# Altium PCB EJ8_LOGIC_PCB.PcbDoc
Units mm, origin at the board's own origin, x right, y up, seen from the top; angles counter-clockwise.
Board outline 100.08 x 50 mm, 2 copper layers (Top Layer, Bottom Layer); 14 components, 43 nets, 99 pads, 38 vias.
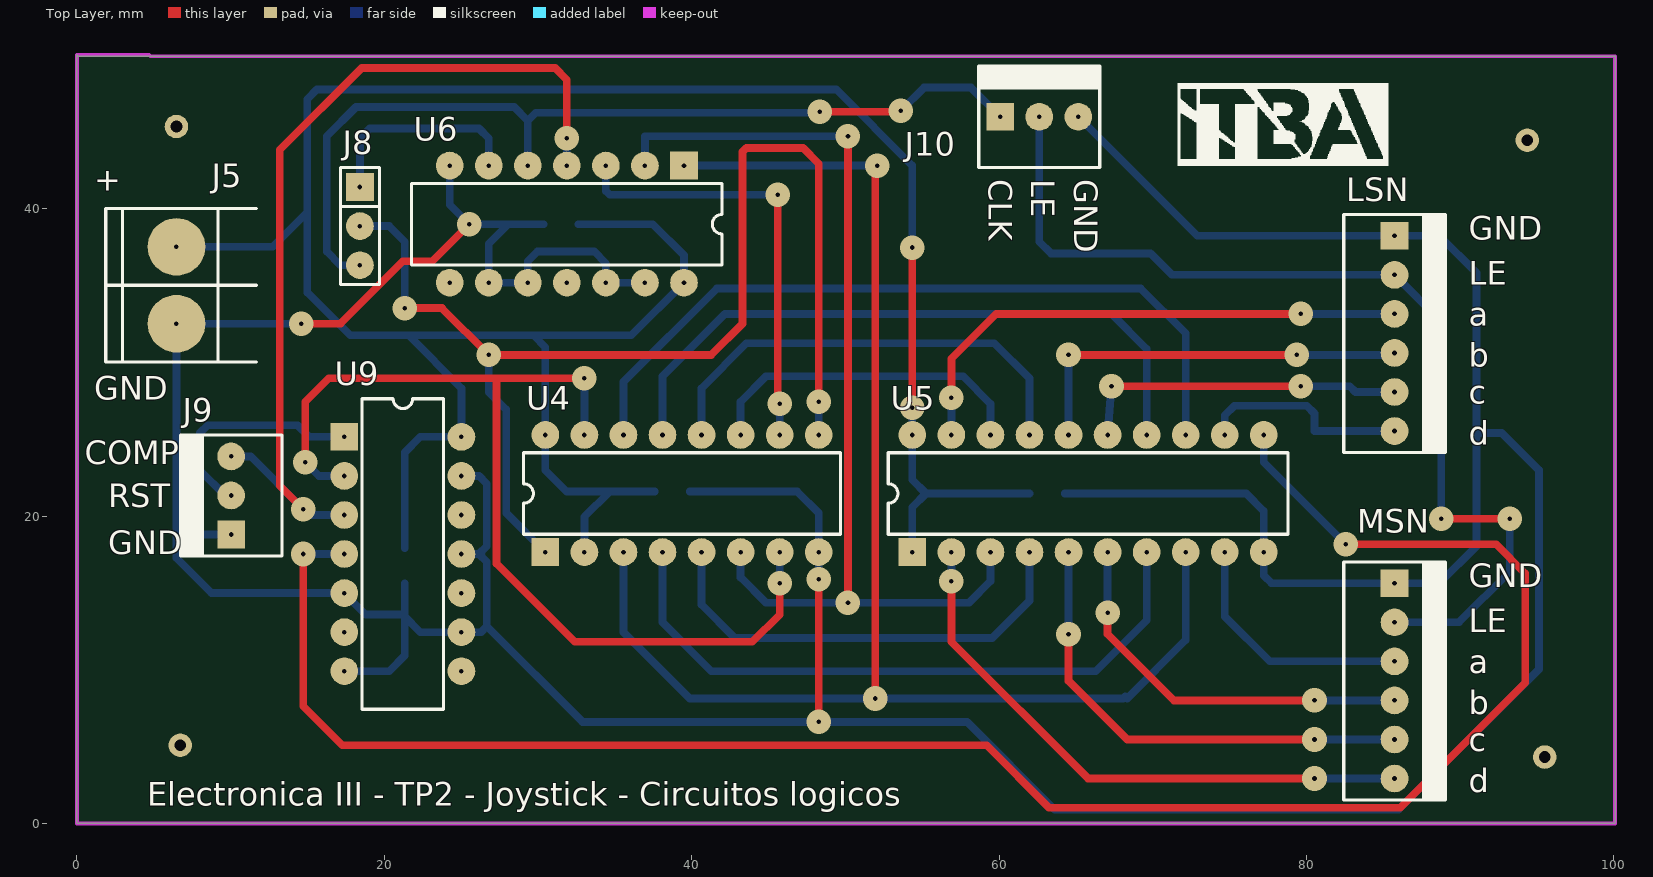
[diagram p0: Top Layer view]
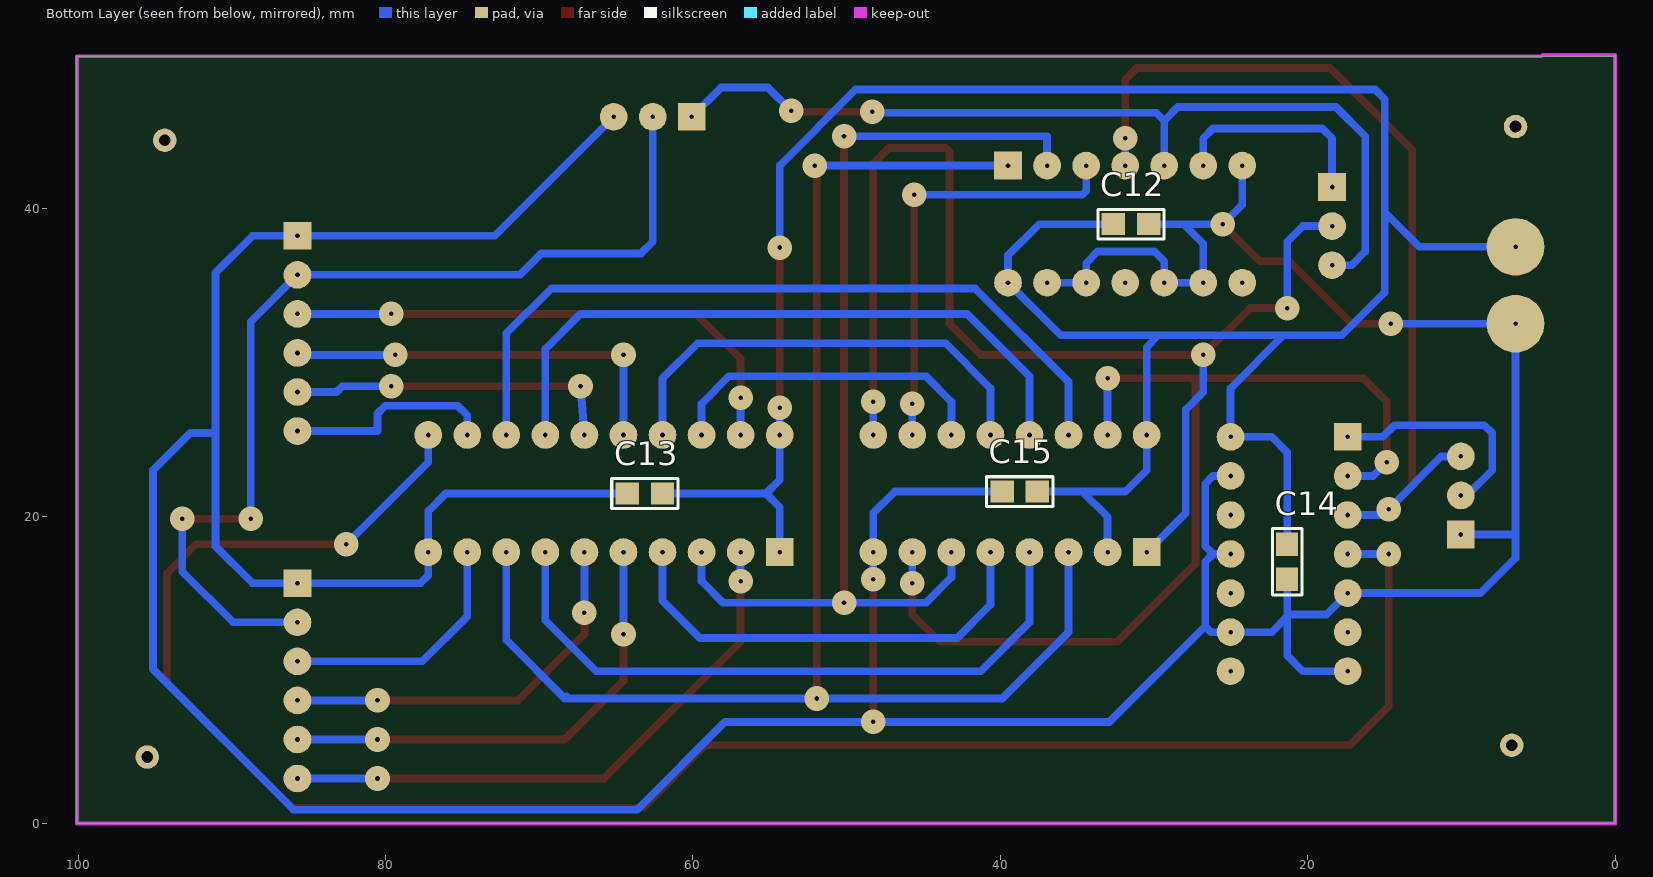
[diagram p1: Bottom Layer view, seen from below]

## Layer stack, top to bottom
Top Solder: solder mask 0.0102, Solder Resist, Dk 3.5
Top Layer: signal copper 0.0356
Dielectric 1: dielectric 0.32, FR-4, Dk 4.8
Bottom Layer: signal copper 0.0356
Bottom Solder: solder mask 0.0102, Solder Resist, Dk 3.5

## Board outline
0,0 0,50 0.089,49.911 100.076,49.911 100.076,0

## Design rules (kind name [scope] priority, off if disabled: settings)
Clearance [All] p1: gap=0.254 ignorepadtopadclearanceinfootprint=FALSE except(0: Arc-Hole Track-Hole SMDPad-Hole THPad-Hole Via-Hole Fill-Hole Poly-Hole Region-Hole Text-Hole)
PolygonConnect [All] p1: connectstyle=Relief reliefconductorwidth=0.254 reliefentries=4 polygonreliefangle="90 Angle" airgapwidth=0.254
RoutingVias [All] p1: holewidth=0.711 width=1.27 viastyle="Through Hole" minholewidth=0.711 minwidth=1.27 maxholewidth=0.711 maxwidth=1.27
SolderMaskExpansion [All] p1: expansion=0.102
Width [All] p1: maxlimit=0.8 minlimit=0.5 preferedwidth=0.7
30 further rules are at their usual default settings.

## Classes and differential pairs
component class EJ8_ANALOG_SCH: U1

## Components (designator, comment, footprint, x,y, rotation, side; value= is the part's Value field where it differs from the comment)
C12 "100n" 0805 31.496,38.989 r180 bottom
C13 "100n" 0805 63.119,21.463 r0 bottom
C14 "100n" 0805 21.336,17.018 r270 bottom
C15 "100n" 0805 38.735,21.59 r0 bottom
J5 "BORNERA 2" BORNERA2 6.477,35.012 r0 top
J8 "JUMPER SELECT" SIP3 18.415,38.862 r270 top
J9 "MOLEX3" MOLEX3 10.033,18.796 r90 top
J10 "MOLEX3" MOLEX3 60.071,45.974 r0 top
LSN "MSN" MOLEX6 85.725,38.227 r270 top (schematic designator J7)
MSN "LSN" MOLEX6 85.725,15.621 r270 top (schematic designator J6)
U4 "HCC4518BF" DIP16 39.37,21.463 r0 top
U5 "M74HC273B1R" DIP20 65.786,21.463 r0 top
U6 "74AC08B" DIP14 31.877,38.989 r180 top
U9 "M74HC14B1R" DIP14 21.209,17.526 r270 top

## Footprints (in the part's own frame and the unit in brackets; to place one, negate y for a bottom-side part, rotate by r counter-clockwise, add the part's x,y. Pads: shape width x height; smd on the part's side, far side on the other; paste and mask are expansions set on the pad)
0805 [mil] "Pasivo 0805"
  rect 60x56 smd: 1(-45,0) 2(45,0)
  silkscreen extent -85,-38 85,38, body extent -40,-25 39,25, height 15
BORNERA2 [mm] "Bornera con Tornillos 5mm separación"
  round 3.75 hole 0.3: 1(0,2.5) 2(0,-2.5)
  silkscreen extent -4.6,-5 5.2,5, body extent -3.76,-4.89 3.94,5.61, height 10
DIP14 [mm] "DIP; 14 Leads; Row Spacing 7.62 mm; Pitch 2.54 mm"
  rect 1.8x1.8 hole 0.3: 1(-7.62,-3.81)
  round 1.8 hole 0.3: 2(-5.08,-3.81) 3(-2.54,-3.81) 4(0,-3.81) 5(2.54,-3.81) 6(5.08,-3.81) 7(7.62,-3.81) 8(7.62,3.81) 9(5.08,3.81) 10(2.54,3.81) 11(0,3.81) 12(-2.54,3.81) 13(-5.08,3.81) 14(-7.62,3.81)
  silkscreen extent -10.1,-2.65 10.1,2.65
DIP16 [mm] "DIP; 16 Leads; Row Spacing 7.62 mm; Pitch 2.54 mm"
  rect 1.8x1.8 hole 0.3: 1(-8.89,-3.81)
  round 1.8 hole 0.3: 2(-6.35,-3.81) 3(-3.81,-3.81) 4(-1.27,-3.81) 5(1.27,-3.81) 6(3.81,-3.81) 7(6.35,-3.81) 8(8.89,-3.81) 9(8.89,3.81) 10(6.35,3.81) 11(3.81,3.81) 12(1.27,3.81) 13(-1.27,3.81) 14(-3.81,3.81) 15(-6.35,3.81) 16(-8.89,3.81)
  silkscreen extent -10.3,-2.65 10.3,2.65
DIP20 [mm] "DIP; 20 Leads; Row Spacing 7.62 mm; Pitch 2.54 mm"
  rect 1.8x1.8 hole 0.3: 1(-11.43,-3.81)
  round 1.8 hole 0.3: 2(-8.89,-3.81) 3(-6.35,-3.81) 4(-3.81,-3.81) 5(-1.27,-3.81) 6(1.27,-3.81) 7(3.81,-3.81) 8(6.35,-3.81) 9(8.89,-3.81) 10(11.43,-3.81) 11(11.43,3.81) 12(8.89,3.81) 13(6.35,3.81) 14(3.81,3.81) 15(1.27,3.81) 16(-1.27,3.81) 17(-3.81,3.81) 18(-6.35,3.81) 19(-8.89,3.81) 20(-11.43,3.81)
  silkscreen extent -13,-2.65 13,2.65
MOLEX3 [mm]
  rect 1.8x1.8 hole 0.3: 1(0,0)
  round 1.8 hole 0.3: 2(2.54,0) 3(5.08,0)
  silkscreen extent -1.4,-3.3 6.48,3.3, body extent -1.27,-3.17 6.35,3.18, height 10.74
MOLEX6 [mm]
  rect 1.8x1.8 hole 0.3: 1(0,0)
  round 1.8 hole 0.3: 2(2.54,0) 3(5.08,0) 4(7.62,0) 5(10.16,0) 6(12.7,0)
  silkscreen extent -1.4,-3.3 14.1,3.3, body extent -1.27,-3.18 13.97,3.18, height 10.74
SIP3 [mm]
  rect 1.8x1.8 hole 0.3: 1(-2.54,0)
  round 1.8 hole 0.3: 2(0,0) 3(2.54,0)
  silkscreen extent -3.81,-1.27 3.81,1.27, body extent -3.81,-1.3 3.81,1.24, height 8.38

## Part data
C12 C13 C14 C15: library part CAP
J8: library part CON3
LSN MSN: library part MOLEX6
U4: "Dual Decade Up-Counter", ComponentLink1Description="Manufacturer Link", ComponentLink1URL=http://www.st.com/, DatasheetVersion=Jun-1989, LatestRevisionDate=06-Jun-2005, LatestRevisionNote="Stylized 3D Model Added.", PackageDescription="DIP; 16 Leads; Row Spacing 7.62 mm; Pitch 2.54 mm", PackageReference=DIP16, PackageVersion=Apr-1996, Published=8-Jun-2000, Publisher="Altium Limited"
U5: "Octal D-Type Flip-Flop with Clear", Code_JEDEC=MS-015-AE, ComponentLink1Description="Manufacturer Link", ComponentLink1URL=http://www.st.com/, ComponentLink2Description=Datasheet, ComponentLink2URL=http://www.st.com/stonline/products/literature/ds/1936/m74hc273.pdf, DatasheetVersion=Oct-1992, LatestRevisionDate=06-Jun-2005, LatestRevisionNote="Stylized 3D Model Added.", PackageDescription="DIP; 20 Leads; Row Spacing 7.62 mm; Pitch 2.54 mm", PackageReference=DIP20, PackageVersion=Jun-1998, Published=8-Jun-2000, Publisher="Altium Limited"
U6: "Quad 2-Input AND Gate", ComponentLink1Description="Manufacturer Link", ComponentLink1URL=http://www.st.com/, ComponentLink2Description=Datasheet, ComponentLink2URL=http://www.st.com/stonline/products/literature/ds/4694/74ac08.pdf, DatasheetVersion=Apr-1997, LatestRevisionDate=06-Jun-2005, LatestRevisionNote="Stylized 3D Model Added.", PackageDescription="DIP; 14 Leads; Row Spacing 7.62 mm; Pitch 2.54 mm", PackageReference=DIP14, PackageVersion=Jan-1997, Published=8-Jun-2000, Publisher="Altium Limited"
U9: "Hex Schmitt Inverter", ComponentLink1Description="Manufacturer Link", ComponentLink1URL=http://www.st.com/, ComponentLink2Description=Datasheet, ComponentLink2URL=http://www.st.com/stonline/products/literature/ds/1901/m74hc14.pdf, DatasheetVersion=Dec-1992, LatestRevisionDate=06-Jun-2005, LatestRevisionNote="Stylized 3D Model Added.", PackageDescription="DIP; 14 Leads; Row Spacing 7.62 mm; Pitch 2.54 mm", PackageReference=DIP14, PackageVersion=Jan-1997, Published=8-Jun-2000, Publisher="Altium Limited"

## Free pads (board coordinates)
  round 1.524 hole 0.762: 6(6.477,45.339) 7(94.361,44.45) 8(6.731,5.08) 9(95.504,4.318)

## Via types
v1: diameter 1.6, hole 0.3, Top Layer to Bottom Layer, 38 vias

## Nets (pads, with @x,y where several pads share a name; then routed paths per layer and width w, separated by ;. In a path a pad name is that pad's centre, name@x,y a point inside that pad or via, vN(x,y) a via of type N, cw(c..) or ccw(c..) an arc to the next point about the centre after c; other vN are vias at no path point)
5V: C12.1 C13.1 C14.1 C15.1 J5.1 U4.2 U4.16 U5.1 U5.20 U6.14 U9.14 | length 172.6
  Top Layer w0.5: v1(54.356,27.051) v1(54.356,37.465)
  Bottom Layer w0.5: J5.1 12.747,37.512 14.986,39.751 ; C14.1@21.336,17.907 C14.1 21.336,24.13 22.352,25.146 U9.14 25.019,28.321 21.59,31.75 ; C12.1 37.465,38.989 39.497,36.957 U6.14 36.068,31.75 29.718,31.75 ; U4.2 33.02,19.939 34.671,21.59 ; C15.1 34.671,21.59 ; U5.1 54.356,20.574 55.245,21.463 ; v1(54.356,27.051) U5.20 54.356,22.352 55.245,21.463 ; v1(54.356,37.465) 54.356,42.799 49.403,47.752 15.621,47.752 14.986,47.117 14.986,39.751 ; C13.1 55.245,21.463 ; 14.986,39.751 14.986,34.544 17.78,31.75 21.59,31.75 ; 21.59,31.75 29.718,31.75 ; 29.718,31.75 30.48,30.988 U4.16 30.48,22.987 31.877,21.59 34.671,21.59
555_CLK: J8.3 J10.1 U6.5 | length 59.6
  Top Layer w0.5: v1(48.323,46.291) 53.53,46.291 v1(53.594,46.355)
  Bottom Layer w0.5: J8.3 17.145,36.322 16.256,37.211 16.256,44.704 18.161,46.609 28.448,46.609 29.337,45.72 ; U6.5 29.337,45.72 ; v1(48.323,46.291) 48.26,46.228 29.845,46.228 29.337,45.72 ; v1(53.594,46.355) 55.118,47.879 58.166,47.879 J10.1
+15V: 
-15V: 
AND_OUT: J8.1 U6.6 | length 13.9
  Bottom Layer w0.5: J8.1 18.415,44.577 19.05,45.212 26.162,45.212 26.797,44.577 U6.6
COMP_OUT: J9.3 U6.4 U9.3 | length 59.7
  Top Layer w0.5: v1(14.732,20.447) 13.208,21.971 13.208,43.815 18.542,49.149 31.115,49.149 31.877,48.387 v1(31.877,44.577)
  Bottom Layer w0.5: J9.3 11.303,23.876 v1(14.732,20.447) 15.113,20.066 U9.3 ; U6.4 v1(31.877,44.577)
COMP_OUT_N: U5.11 U9.4 | length 127.1
  Top Layer w0.5: v1(14.732,17.526) 14.732,7.62 17.272,5.08 59.182,5.08 63.246,1.016 86.106,1.016 94.234,9.144 94.234,16.256 92.329,18.161 v1(82.55,18.161)
  Bottom Layer w0.5: v1(14.732,17.526) U9.4 ; U5.11 77.216,23.495 v1(82.55,18.161)
COUNT_CLK: J8.2 U4.1 U4.9 | length 80.4
  Top Layer w0.5: v1(21.336,33.528) 23.749,33.528 v1(26.797,30.48) 41.275,30.48 43.307,32.512 43.307,43.688 43.561,43.942 47.244,43.942 48.26,42.926 v1(48.26,27.432)
  Bottom Layer w0.5: J8.2 20.32,38.862 21.336,37.846 v1(21.336,33.528) ; v1(26.797,30.48) 26.797,28.067 27.94,26.924 27.94,20.193 U4.1 ; U4.9 v1(48.26,27.432)
COUNT_RST: U4.7 U4.15 U9.2 | length 66.7
  Top Layer w0.5: v1(14.859,23.495) 14.859,27.432 16.383,28.956 27.305,28.956 ; v1(33.02,28.956) 27.305,28.956 ; v1(45.72,15.621) 45.72,13.589 43.942,11.811 32.385,11.811 27.305,16.891 27.305,28.956
  Bottom Layer w0.5: v1(14.859,23.495) 15.748,22.606 U9.2 ; U4.15 v1(33.02,28.956) ; v1(45.72,15.621) U4.7
COUNT_RST_IN: J9.2 U9.1 | length 15.1
  Bottom Layer w0.5: J9.2 9.652,21.336 8.001,22.987 8.001,25.4 8.509,25.908 14.351,25.908 15.113,25.146 U9.1
COUNTER_RST: 
GND: C12.2 C13.2 C14.2 C15.2 J5.2 J9.1 J10.3 LSN.1 MSN.1 U4.8 U5.10 U6.7 U6.9 U6.10 U6.12 U6.13 U9.5 U9.7 U9.9 U9.11 U9.13 | length 309.9
  Top Layer w0.5: v1(14.605,32.512) 17.145,32.512 21.209,36.576 23.114,36.576 v1(25.527,38.989) ; v1(48.26,6.604) v1(48.26,15.875)
  Bottom Layer w0.5: J9.1 6.604,18.796 6.477,18.669 ; v1(14.605,32.512) J5.2 6.477,18.669 ; U9.7 20.32,9.906 21.336,10.922 21.336,13.462 ; C14.2@21.336,15.621 21.336,13.716 ; U6.7 24.257,40.259 v1(25.527,38.989) 28.067,38.989 ; U9.11 26.162,17.526 ; U9.13 26.162,22.606 26.67,22.098 26.67,18.034 26.162,17.526 ; C12.2 28.067,38.989 ; U6.13 U6.12 34.417,36.449 33.655,37.211 29.972,37.211 29.337,36.576 U6.10 U6.9 26.797,37.719 28.067,38.989 ; C15.2 46.863,21.59 48.26,20.193 U4.8 v1(48.26,15.875) ; C13.2 76.073,21.463 77.216,20.32 U5.10 77.216,16.129 77.724,15.621 MSN.1 88.646,15.621 91.059,18.034 91.059,25.4 ; J10.3 72.898,38.227 LSN.1 88.646,38.227 91.059,35.814 91.059,25.4 ; 6.477,18.669 6.477,17.272 8.763,14.986 U9.5 18.796,13.589 21.209,13.589 21.336,13.716 ; 21.336,13.462 22.352,12.446 U9.9 26.289,12.446 26.67,12.827 ; 21.336,13.462 21.336,13.716 ; 26.162,17.526 26.67,17.018 26.67,12.827 ; 26.67,12.827 32.893,6.604 v1(48.26,6.604) 57.912,6.604 63.627,0.889 85.979,0.889 95.123,10.033 95.123,22.987 92.71,25.4 91.059,25.4
JOY_IN: 
LE: J10.2 LSN.2 MSN.2 | length 66
  Top Layer w0.5: v1(88.773,19.812) v1(93.218,19.812)
  Bottom Layer w0.5: J10.2 62.611,37.846 63.373,37.084 69.85,37.084 71.247,35.687 LSN.2 88.773,32.639 v1(88.773,19.812) ; MSN.2 89.916,13.081 93.218,16.383 v1(93.218,19.812)
NetC3_1: 
NetD1_1: 
NetD1_2: 
NetD2_2: 
NetR1_1: 
NetR2_1: 
NetR4_1: 
NetR5_1: 
NetR7_1: 
NetU1_5: 
NetU4_10: U4.10 U6.3 | length 28.6
  Top Layer w0.5: v1(45.593,40.894) 45.593,27.432 v1(45.72,27.305)
  Bottom Layer w0.5: U6.3 34.417,41.148 34.671,40.894 v1(45.593,40.894) ; U4.10 v1(45.72,27.305)
Q0A: U4.3 U5.8 U6.1 | length 98.3
  Top Layer w0.5: v1(51.943,8.128) 51.943,42.672 v1(52.07,42.799)
  Bottom Layer w0.5: U4.3 35.56,12.446 39.878,8.128 v1(51.943,8.128) 68.072,8.128 68.199,8.255 68.326,8.128 72.136,11.938 U5.8 ; U6.1 v1(52.07,42.799)
Q0A_L: MSN.3 U5.9 | length 16.4
  Bottom Layer w0.5: U5.9 74.676,13.462 77.597,10.541 MSN.3
Q0B: U4.11 U5.18 | length 21.9
  Bottom Layer w0.5: U4.11 43.18,27.432 44.831,29.083 57.658,29.083 59.436,27.305 U5.18
Q0B_L: LSN.3 U5.19 | length 35
  Top Layer w0.5: v1(56.896,27.686) 56.896,30.226 59.817,33.147 v1(79.629,33.147)
  Bottom Layer w0.5: U5.19 v1(56.896,27.686) ; v1(79.629,33.147) LSN.3
Q1A: U4.4 U5.7 | length 43.2
  Bottom Layer w0.5: U4.4 38.1,13.081 41.275,9.906 66.294,9.906 69.596,13.208 U5.7
Q1A_L: MSN.4 U5.6 | length 25.8
  Top Layer w0.5: v1(67.056,13.716) 67.056,12.319 71.374,8.001 v1(80.518,8.001)
  Bottom Layer w0.5: v1(67.056,13.716) U5.6 ; v1(80.518,8.001) MSN.4
Q1B: U4.12 U5.17 | length 30.2
  Bottom Layer w0.5: U4.12 40.64,28.321 43.561,31.242 59.69,31.242 61.976,28.956 U5.17
Q1B_L: LSN.4 U5.16 | length 26.6
  Top Layer w0.5: v1(64.516,30.48) v1(79.375,30.48) v1@79.502,30.48
  Bottom Layer w0.5: U5.16 v1(64.516,30.48) ; v1(79.375,30.48) 85.598,30.48 LSN.4
Q2A: U4.5 U5.4 | length 29.8
  Bottom Layer w0.5: U4.5 40.64,14.224 42.799,12.065 59.563,12.065 61.976,14.478 U5.4
Q2A_L: MSN.5 U5.5 | length 31.2
  Top Layer w0.5: v1(64.516,12.319) 64.516,9.271 68.326,5.461 v1(80.518,5.461)
  Bottom Layer w0.5: v1(64.516,12.319) U5.5 ; v1(80.518,5.461) MSN.5
Q2B: U4.13 U5.14 | length 43.5
  Bottom Layer w0.5: U4.13 38.1,29.083 42.164,33.147 67.31,33.147 69.596,30.861 U5.14
Q2B_L: LSN.5 U5.15 | length 22
  Top Layer w0.5: v1(67.31,28.448) v1(79.629,28.448) v1@79.883,28.448
  Bottom Layer w0.5: U5.15 v1(67.31,28.448) ; v1(79.629,28.448) 82.804,28.448 83.185,28.067 LSN.5
Q3A: U4.6 U5.3 U6.2 | length 66.5
  Top Layer w0.5: v1(50.165,14.351) v1(50.165,44.704)
  Bottom Layer w0.5: U6.2 36.957,44.704 v1(50.165,44.704) ; U4.6 43.18,16.002 44.831,14.351 v1(50.165,14.351) 58.039,14.351 59.436,15.748 U5.3
Q3A_L: MSN.6 U5.2 | length 38.6
  Top Layer w0.5: v1(56.896,15.748) 56.896,11.811 65.786,2.921 v1(80.518,2.921)
  Bottom Layer w0.5: v1@56.896,15.494 v1(56.896,15.748) U5.2 ; v1(80.518,2.921) MSN.6
Q3B: U4.14 U5.13 | length 50.4
  Bottom Layer w0.5: U4.14 35.56,28.734 41.624,34.798 69.215,34.798 72.136,31.877 U5.13
Q3B_L: LSN.6 U5.12 | length 13.9
  Bottom Layer w0.5: U5.12 74.676,26.543 75.311,27.178 80.01,27.178 80.518,26.67 80.518,25.527 LSN.6
RAMP: 
VCC: 
pads on no net: U6.8 U6.11 U9.6 U9.8 U9.10 U9.12

## Keep-outs
Keep-Out Layer:
  lines w0.254: 0,0 0,50 4.699,50 4.788,49.911 100.076,49.911 100.076,0 0,0

## Silkscreen, mask and mechanical layers (free items; w line width, h text height)
Top Overlay:
  region: 237 vertices and 8 holes, not listed, extent 71.622,42.801 85.318,48.143
  text "CLK" at 59.309,41.91 h1.52 r270
  text "LE" at 62.103,41.91 h1.52 r270
  text "GND" at 64.897,41.91 h1.52 r270
  text "+" at 1.143,41.148 h1.52
  text "GND" at 90.551,37.973 h1.52
  text "LE" at 90.551,35.052 h1.52
  text "a" at 90.551,32.385 h1.52
  text "b" at 90.551,29.718 h1.52
  text "GND" at 1.143,27.559 h1.52
  text "c" at 90.551,27.305 h1.52
  text "d" at 90.551,24.638 h1.52
  text "COMP" at 0.508,23.368 h1.52
  text "RST" at 2.032,20.574 h1.52
  text "GND" at 2.032,17.526 h1.52
  text "GND" at 90.551,15.367 h1.52
  text "LE" at 90.551,12.446 h1.52
  text "a" at 90.551,9.779 h1.52
  text "b" at 90.551,7.112 h1.52
  text "c" at 90.551,4.699 h1.52
  text "d" at 90.551,2.032 h1.52
  text "Electronica III - TP2 - Joystick - Circuitos logicos" at 4.572,1.143 h1.52